# Altium PCB 20230727_DAFABT-验证-FPC-73颗灯板.PcbDoc (part 1 of 2)
Units mm, origin at the board's own origin, x right, y up, seen from the top; angles counter-clockwise.
Board outline 277.23 x 135.59 mm, 2 copper layers (Top Layer, Bottom Layer); 80 components, 3 nets, 172 pads, 0 vias.
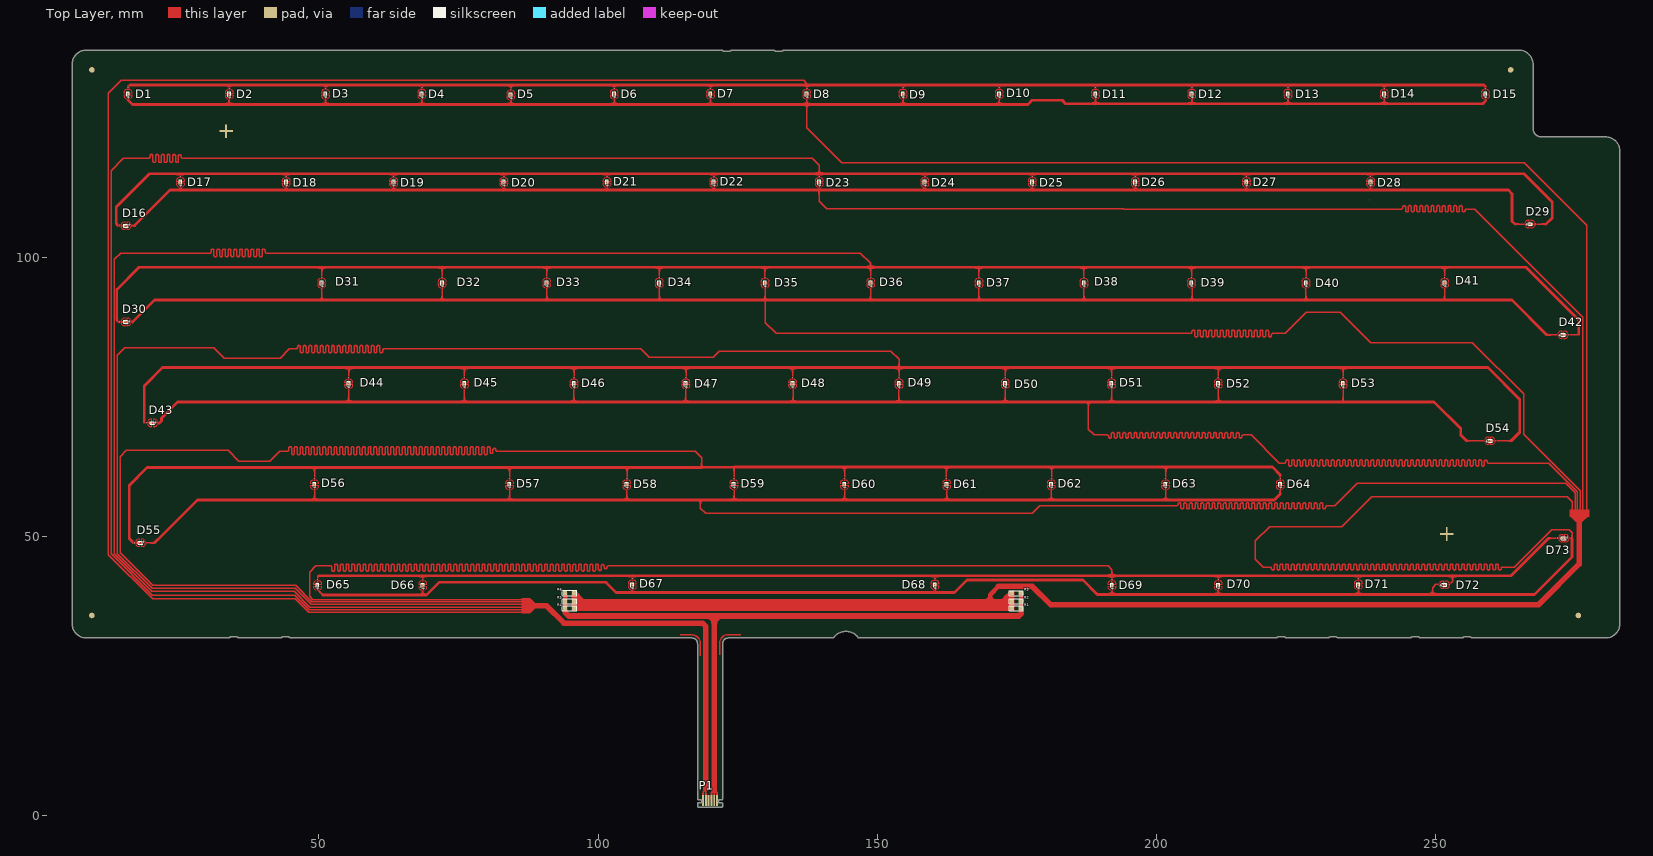
[diagram p0: Top Layer view]
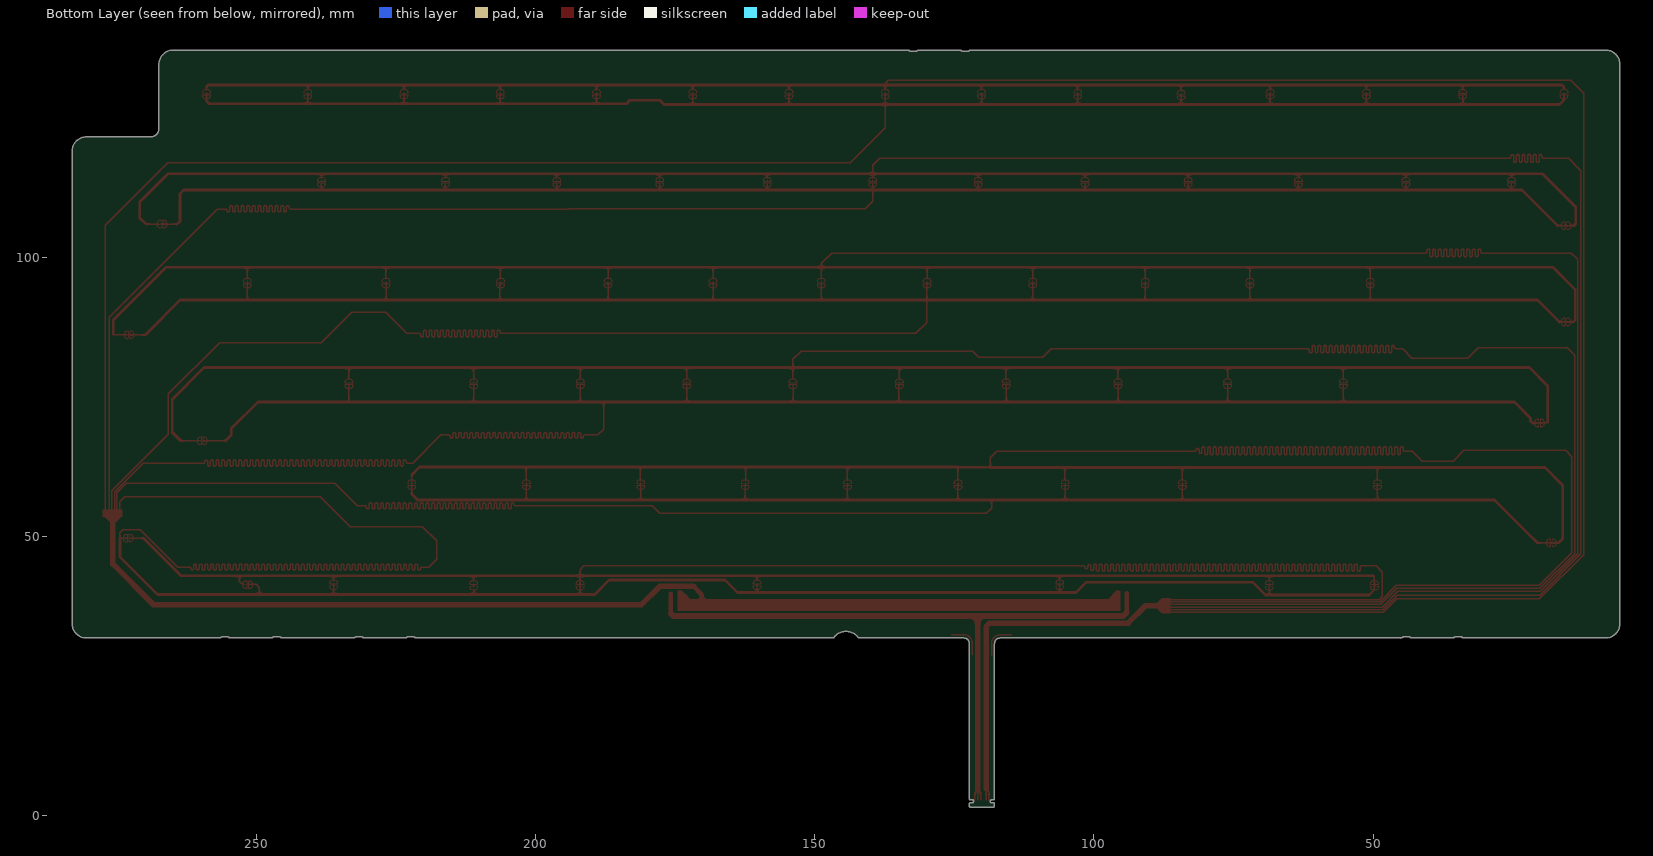
[diagram p1: Bottom Layer view, seen from below]

## Layer stack, top to bottom
Top Solder: solder mask 0.0102, Solder Resist, Dk 3.5
Top Layer: signal copper 0.0356
Dielectric 1: dielectric 0.32, FR-4, Dk 4.8
Bottom Layer: signal copper 0.0356
Bottom Solder: solder mask 0.0102, Solder Resist, Dk 3.5

## Board outline
8.399,31.791 33.785,31.791 ccw(c33.785,32.091) 33.983,31.865 cw(c34.314,31.491) 34.314,31.99 35.214,31.99 cw(c35.214,31.491) 35.545,31.865 ccw(c35.743,32.091) 35.743,31.791 43.085,31.791 ccw(c43.085,32.09) 43.283,31.865 cw(c43.614,31.49) 43.614,31.99 44.514,31.99 cw(c44.514,31.49) 44.845,31.865 44.845,31.866 ccw(c45.029,32.054) 45.043,31.791 116.816,31.791 cw(c116.816,30.79) 117.816,30.79 117.816,3 ccw(c118.016,3) 118.016,2.8 118.366,2.8 cw(c118.366,2.601) 118.566,2.601 118.566,2.5 cw(c118.366,2.5) 118.366,2.3 118.016,2.3 ccw(c118.016,2.1) 117.816,2.1 117.816,1.7 ccw(c118.016,1.7) 118.016,1.5 122.116,1.5 ccw(c122.116,1.7) 122.316,1.7 122.316,2.1 ccw(c122.116,2.1) 122.116,2.3 121.766,2.3 cw(c121.766,2.5) 121.566,2.5 121.566,2.601 cw(c121.766,2.601) 121.766,2.8 122.116,2.8 ccw(c122.116,3) 122.316,3 122.316,30.79 cw(c123.316,30.79) 123.316,31.791 142.006,31.791 ccw(c142.006,32.09) 142.246,31.911 cw(c144.406,30.29) 146.566,31.911 ccw(c146.806,32.09) 146.806,31.791 221.385,31.791 ccw(c221.385,32.091) 221.583,31.865 cw(c221.914,31.491) 221.914,31.99 222.814,31.99 cw(c222.814,31.49) 223.145,31.865 ccw(c223.343,32.091) 223.343,31.791 230.685,31.791 ccw(c230.685,32.091) 230.883,31.865 cw(c231.214,31.491) 231.214,31.99 232.114,31.99 cw(c232.114,31.491) 232.445,31.865 ccw(c232.643,32.091) 232.643,31.791 245.385,31.791 ccw(c245.385,32.091) 245.583,31.865 cw(c245.914,31.491) 245.914,31.99 246.814,31.99 cw(c246.814,31.491) 247.145,31.865 ccw(c247.347,32.102) 247.343,31.791 254.685,31.791 ccw(c254.685,32.091) 254.883,31.865 cw(c255.214,31.491) 255.214,31.99 256.114,31.99 cw(c256.114,31.491) 256.445,31.865 ccw(c256.643,32.091) 256.643,31.791 280.424,31.791 ccw(c280.424,34.391) 283.024,34.391 283.024,118.94 ccw(c280.424,118.94) 280.424,121.54 268.973,121.54 cw(c268.973,123.04) 267.473,123.04 267.473,134.49 ccw(c264.873,134.49) 264.873,137.09 133.323,137.09 ccw(c133.323,136.79) 133.125,137.015 cw(c132.794,137.39) 132.794,136.89 131.894,136.89 cw(c131.894,137.39) 131.563,137.015 ccw(c131.365,136.79) 131.365,137.09 124.023,137.09 ccw(c124.023,136.791) 123.825,137.015 cw(c123.494,137.391) 123.494,136.89 122.594,136.89 cw(c122.594,137.391) 122.263,137.015 ccw(c122.065,136.791) 122.065,137.09 8.399,137.09 ccw(c8.399,134.49) 5.799,134.49 5.799,34.391 ccw(c8.399,34.391)

## Design rules (kind name [scope] priority, off if disabled: settings)
Clearance [All] p1: gap=0.254 ignorepadtopadclearanceinfootprint=TRUE except(0: Arc-Hole Track-Hole SMDPad-Hole THPad-Hole Via-Hole Fill-Hole Poly-Hole Region-Hole Text-Hole)
ComponentClearance [All] p1 off: gap=0.254 collisioncheckmode=3 verticalgap=0.254 showdistances=FALSE
MinimumSolderMaskSliver [All] p1 off: minsoldermaskwidth=0.254
PlaneClearance [All] p1 off: clearance=0.508
PlaneConnect [All] p1: pad.planeconnectstyle=Relief pad.reliefexpansion=0.508 pad.reliefentries=4 pad.reliefconductorwidth=0.254 pad.reliefairgap=0.254 via.planeconnectstyle=Direct via.reliefexpansion=0.508 via.reliefentries=4 via.reliefconductorwidth=0.254 via.reliefairgap=0.254
PolygonConnect [All] p1: connectstyle=Relief reliefconductorwidth=0.254 reliefentries=4 polygonreliefangle="90 Angle" airgapwidth=0.254
RoutingVias [All] p1: holewidth=0.711 width=1.27 viastyle="Through Hole" minholewidth=0.711 minwidth=1.27 maxholewidth=0.711 maxwidth=1.27
SilkToSilkClearance [All] p1 off: silktosilkclearance=0.254
SilkToSolderMaskClearance [IsPad] p1 off: minsilkscreentomaskgap=0.254 clearancetoexposedcopper=TRUE
SolderMaskExpansion [All] p1: expansion=0.102 istentingtop=FALSE
Width [All] p1: maxlimit=0.254 minlimit=0.254 preferedwidth=0.254
24 further rules are at their usual default settings.

## Components (designator, comment, footprint, x,y, rotation, side; value= is the part's Value field where it differs from the comment)
D1 "W" 圆弧灯 15.824,129.215 r0 top
D2 "W" 圆弧灯 33.967,129.162 r0 top
D3 "W" 圆弧灯 51.204,129.206 r0 top
D4 "W" 圆弧灯 68.44,129.215 r0 top
D5 "W" 圆弧灯 84.39,129.029 r0 top
D6 "W" 圆弧灯 102.913,129.206 r0 top
D7 "W" 圆弧灯 120.15,129.206 r0 top
D8 "W" 圆弧灯 137.386,129.206 r0 top
D9 "W" 圆弧灯 154.623,129.215 r0 top
D10 "W" 圆弧灯 171.859,129.215 r0 top
D11 "W" 圆弧灯 189.096,129.215 r0 top
D12 "W" 圆弧灯 206.332,129.215 r0 top
D13 "W" 圆弧灯 223.569,129.215 r0 top
D14 "W" 圆弧灯 240.805,129.206 r0 top
D15 "W" 圆弧灯 258.948,129.198 r0 top
D16 "W" 圆弧灯 15.464,105.631 r90 top
D17 "W" 圆弧灯 25.219,113.412 r0 top
D18 "W" 圆弧灯 44.143,113.412 r0 top
D19 "W" 圆弧灯 63.389,113.412 r0 top
D20 "W" 圆弧灯 83.13,113.412 r0 top
D21 "W" 圆弧灯 101.606,113.412 r0 top
D22 "W" 圆弧灯 120.727,113.412 r0 top
D23 "W" 圆弧灯 139.628,113.412 r0 top
D24 "W" 圆弧灯 158.518,113.412 r0 top
D25 "W" 圆弧灯 177.778,113.412 r0 top
D26 "W" 圆弧灯 196.222,113.412 r0 top
D27 "W" 圆弧灯 216.134,113.412 r0 top
D28 "W" 圆弧灯 238.367,113.412 r0 top
D29 "W" 圆弧灯 266.91,105.92 r270 top
D30 "W" 圆弧灯 15.464,88.407 r90 top (schematic designator 30)
D31 "W" 圆弧灯 50.517,95.362 r0 top
D32 "W" 圆弧灯 72.085,95.362 r0 top
D33 "W" 圆弧灯 90.813,95.362 r0 top
D34 "W" 圆弧灯 110.971,95.362 r0 top
D35 "W" 圆弧灯 129.917,95.362 r0 top
D36 "W" 圆弧灯 148.843,95.362 r0 top
D37 "W" 圆弧灯 168.241,95.362 r0 top
D38 "W" 圆弧灯 187.033,95.362 r0 top
D39 "W" 圆弧灯 206.281,95.362 r0 top
D40 "W" 圆弧灯 226.797,95.362 r0 top
D41 "W" 圆弧灯 251.637,95.362 r0 top
D42 "W" 圆弧灯 272.797,86.09 r270 top
D43 "W" 圆弧灯 20.201,70.309 r90 top
D44 "W" 圆弧灯 55.332,77.312 r0 top
D45 "W" 圆弧灯 76.072,77.312 r0 top
D46 "W" 圆弧灯 95.689,77.312 r0 top
D47 "W" 圆弧灯 115.722,77.312 r0 top
D48 "W" 圆弧灯 134.853,77.312 r0 top
D49 "W" 圆弧灯 153.911,77.312 r0 top
D50 "W" 圆弧灯 172.935,77.312 r0 top
D51 "W" 圆弧灯 191.975,77.312 r0 top
D52 "W" 圆弧灯 211.072,77.312 r0 top
D53 "W" 圆弧灯 233.435,77.312 r0 top
D54 "W" 圆弧灯 259.71,67.111 r270 top
D55 "W" 圆弧灯 18.066,48.842 r90 top
D56 "W" 圆弧灯 49.216,59.262 r0 top
D57 "W" 圆弧灯 84.161,59.262 r0 top
D58 "W" 圆弧灯 105.143,59.262 r0 top
D59 "W" 圆弧灯 124.331,59.262 r0 top
D60 "W" 圆弧灯 144.131,59.262 r0 top
D61 "W" 圆弧灯 162.447,59.262 r0 top
D62 "W" 圆弧灯 181.178,59.262 r0 top
D63 "W" 圆弧灯 201.651,59.262 r0 top
D64 "W" 圆弧灯 222.18,59.262 r0 top
D65 "W" 圆弧灯 49.765,41.212 r0 top
D66 "W" 圆弧灯 68.603,41.212 r0 top
D67 "W" 圆弧灯 106.135,41.305 r0 top
D68 "W" 圆弧灯 160.336,41.305 r0 top
D69 "W" 圆弧灯 192.036,41.212 r0 top
D70 "W" 圆弧灯 211.086,41.212 r0 top
D71 "W" 圆弧灯 236.168,41.305 r0 top
D72 "W" 圆弧灯 251.568,41.327 r270 top
D73 "W" 圆弧灯 272.966,49.652 r90 top
P1 "FPC-6PIN" MINI-FPC-6P 118.816,2.7 r0 top
R1 "RJ" 改0603 174.922,37.11 r180 top
R2 "RJ" 改0603 174.922,38.37 r180 top
R3 "RJ" 改0603 174.922,39.823 r180 top
R4 "RJ" 改0603 94.899,37.11 r0 top
R5 "RJ" 改0603 94.899,38.37 r0 top
R6 "RJ" 改0603 94.899,39.823 r0 top

## Footprints (in the part's own frame and the unit in brackets; to place one, negate y for a bottom-side part, rotate by r counter-clockwise, add the part's x,y. Pads: shape width x height; smd on the part's side, far side on the other; paste and mask are expansions set on the pad)
MINI-FPC-6P [mm]
  rect 0.35x2 smd: 1(0,0) 2(0.5,0) 3(1,0) 4(1.5,0) 5(2,0) 6(2.5,0)
圆弧灯 [mm]
  rect 0.3x0.26 smd: 1(0,-0.19) 2(0,0.19)
  Top Layer region: 0.251,0.9 0.317,0.885 0.419,0.845 0.513,0.787 0.595,0.712 0.661,0.624 0.709,0.527 0.74,0.421 0.75,0.31 0.75,0.159 0.739,0.133 0.716,0.119 0.131,0.116 0.131,0.116 0.131,0.115 0.131,0.115 0.131,0.115 0.13,0.115 0.13,0.115 0.13,0.061 -0.127,0.061 -0.127,0.115 -0.128,0.115 -0.128,0.115 -0.128,0.115 -0.128,0.115 -0.129,0.116 -0.713,0.119 -0.737,0.133 -0.747,0.159 -0.745,0.371 -0.724,0.48 -0.687,0.574 -0.626,0.675 -0.551,0.757 -0.463,0.823 -0.364,0.872 -0.264,0.9 -0.171,0.91 0.103,0.91 hole: -0.128,0.715 -0.128,0.714 -0.128,0.715 -0.226,0.704 -0.226,0.704 -0.226,0.704 -0.303,0.681 -0.303,0.681 -0.303,0.681 -0.381,0.637 -0.381,0.637 -0.381,0.637 -0.447,0.576 -0.447,0.575 -0.448,0.575 -0.498,0.501 -0.498,0.501 -0.499,0.501 -0.531,0.417 -0.531,0.417 -0.532,0.417 -0.537,0.378 -0.537,0.378 -0.545,0.328 -0.545,0.328 -0.545,0.328 -0.545,0.313 -0.545,0.313 -0.545,0.313 -0.544,0.289 -0.544,0.288 -0.544,0.288 -0.544,0.287 -0.529,0.272 -0.529,0.272 -0.528,0.271 -0.511,0.265 -0.511,0.265 -0.511,0.265 -0.129,0.265 -0.128,0.265 -0.127,0.266 -0.127,0.318 -0.074,0.318 -0.073,0.319 -0.072,0.319 -0.072,0.71 -0.073,0.71 -0.073,0.711 -0.073,0.711 -0.073,0.711 -0.073,0.711 -0.073,0.711 -0.1,0.714 -0.101,0.714 -0.101,0.714 hole: 0.076,0.71 0.076,0.71 0.076,0.71 0.076,0.71 0.075,0.709 0.075,0.709 0.075,0.709 0.075,0.319 0.076,0.319 0.076,0.318 0.13,0.318 0.13,0.266 0.131,0.265 0.131,0.265 0.511,0.265 0.511,0.265 0.512,0.265 0.523,0.268 0.523,0.268 0.523,0.268 0.541,0.283 0.541,0.283 0.541,0.283 0.549,0.302 0.549,0.302 0.55,0.303 0.55,0.312 0.55,0.312 0.55,0.312 0.54,0.401 0.539,0.401 0.539,0.401 0.51,0.486 0.509,0.486 0.509,0.486 0.461,0.562 0.461,0.562 0.461,0.562 0.397,0.626 0.397,0.626 0.397,0.626 0.321,0.673 0.321,0.673 0.32,0.673 0.235,0.702 0.235,0.702 0.235,0.702 0.22,0.705 0.22,0.705 0.22,0.705 0.076,0.71 0.076,0.71 0.076,0.71
  Top Layer region: 0.129,-0.115 0.129,-0.116 0.129,-0.116 0.129,-0.116 0.129,-0.116 0.13,-0.116 0.13,-0.117 0.716,-0.12 0.741,-0.135 0.75,-0.163 0.74,-0.415 0.722,-0.486 0.684,-0.583 0.626,-0.676 0.551,-0.757 0.463,-0.823 0.365,-0.872 0.259,-0.902 0.149,-0.912 -0.198,-0.909 -0.306,-0.89 -0.41,-0.852 -0.504,-0.795 -0.586,-0.722 -0.654,-0.635 -0.705,-0.537 -0.736,-0.432 -0.749,-0.322 -0.748,-0.163 -0.739,-0.135 -0.714,-0.12 -0.13,-0.12 -0.129,-0.119 -0.129,-0.119 -0.129,-0.062 0.129,-0.062 hole: -0.13,-0.266 -0.511,-0.266 -0.511,-0.266 -0.511,-0.266 -0.523,-0.269 -0.523,-0.269 -0.523,-0.269 -0.533,-0.275 -0.533,-0.276 -0.534,-0.276 -0.546,-0.292 -0.546,-0.292 -0.546,-0.292 -0.546,-0.304 -0.547,-0.316 -0.547,-0.316 -0.547,-0.317 -0.537,-0.405 -0.537,-0.406 -0.537,-0.406 -0.507,-0.49 -0.507,-0.49 -0.507,-0.49 -0.459,-0.566 -0.458,-0.566 -0.458,-0.566 -0.395,-0.628 -0.394,-0.628 -0.394,-0.629 -0.318,-0.675 -0.318,-0.675 -0.318,-0.675 -0.233,-0.704 -0.233,-0.704 -0.233,-0.704 -0.221,-0.706 -0.221,-0.706 -0.221,-0.706 -0.075,-0.711 -0.075,-0.711 -0.075,-0.711 -0.075,-0.711 -0.074,-0.711 -0.074,-0.711 -0.074,-0.711 -0.074,-0.71 -0.074,-0.71 -0.074,-0.71 -0.074,-0.32 -0.074,-0.32 -0.075,-0.319 -0.129,-0.319 -0.129,-0.267 -0.129,-0.266 hole: 0.13,-0.266 0.129,-0.266 0.129,-0.267 0.129,-0.319 0.075,-0.319 0.074,-0.32 0.074,-0.32 0.074,-0.709 0.074,-0.71 0.074,-0.71 0.074,-0.71 0.074,-0.71 0.075,-0.71 0.075,-0.711 0.098,-0.713 0.098,-0.713 0.098,-0.713 0.121,-0.714 0.121,-0.714 0.121,-0.714 0.179,-0.711 0.179,-0.711 0.179,-0.711 0.237,-0.704 0.237,-0.704 0.237,-0.704 0.322,-0.675 0.322,-0.675 0.322,-0.675 0.399,-0.627 0.399,-0.627 0.399,-0.627 0.463,-0.564 0.463,-0.563 0.463,-0.563 0.511,-0.487 0.511,-0.487 0.511,-0.487 0.541,-0.402 0.541,-0.402 0.541,-0.402 0.551,-0.313 0.551,-0.313 0.551,-0.313 0.551,-0.313 0.551,-0.313 0.551,-0.313 0.55,-0.295 0.55,-0.295 0.55,-0.295 0.538,-0.277 0.538,-0.277 0.538,-0.277 0.521,-0.268 0.521,-0.268 0.521,-0.267 0.513,-0.266 0.513,-0.266 0.513,-0.266
  silkscreen extent -0.25,-0.42 0.25,0.42
改0603 [mm]
  rect 0.75x0.75 smd: 1(-0.8,0) 2(0.8,0)
  silkscreen extent -1.27,-0.47 1.27,0.48

## Part data
D1 D2 D3 D4 D5 D6 D7 D8 D9 D10 D11 D12 D13 D14 D15 D16 D17 D18 D19 D20 D21 D22 D23 D24 D25 D26 D27 D28 D29 D30 D31 D32 D33 D34 D35 D36 D37 D38 D39 D40 D41 D42 D43 D44 D45 D46 D47 D48 D49 D50 D51 D52 D53 D54 D55 D56 D57 D58 D59 D60 D61 D62 D63 D64 D65 D66 D67 D68 D69 D70 D71 D72 D73: library part LED
R1 R2 R3 R4 R5 R6: library part RJ0603

## Free pads (board coordinates)
  round 1 smd: 5(9.348,133.534) 6(9.348,35.825) 7(263.453,133.534) 8(275.585,35.825)
  rect 0.3x2.428 smd: 9(33.385,122.582) 11(252.008,50.415)
  rect 2.428x0.3 smd: 10(33.385,122.582) 12(252.008,50.415)

## Nets (pads, with @x,y where several pads share a name; then routed paths per layer and width w, separated by ;. In a path a pad name is that pad's centre, name@x,y a point inside that pad or via, vN(x,y) a via of type N, cw(c..) or ccw(c..) an arc to the next point about the centre after c; other vN are vias at no path point)
GND: D1.2 D2.2 D3.2 D4.2 D5.2 D6.2 D7.2 D8.2 D9.2 D10.2 D11.2 D12.2 D13.2 D14.2 D15.2 D16.2 D17.2 D18.2 D19.2 D20.2 D21.2 D22.2 D23.2 D24.2 D25.2 D26.2 D27.2 D28.2 D29.2 D30.2 D31.2 D32.2 D33.2 D34.2 D35.2 D36.2 D37.2 D38.2 D39.2 D40.2 D41.2 D42.2 D43.2 D44.2 D45.2 D46.2 D47.2 D48.2 D49.2 D50.2 D51.2 D52.2 D53.2 D54.2 D55.2 D56.2 D57.2 D58.2 D59.2 D60.2 D61.2 D62.2 D63.2 D64.2 D65.2 D66.2 D67.2 D68.2 D69.2 D70.2 D71.2 D72.2 D73.2 P1.1 P1.2 | length 3414.2
  Top Layer w0.254: 14.08,105.631 D16.2@15.274,105.631 ; 14.133,88.407 D30.2@15.274,88.407 ; 15.821,130.006 15.863,130.048 15.863,130.543 ; 16.817,48.842 D55.2@17.876,48.842 ; 18.72,70.458 18.869,70.309 D43.2@20.011,70.309 ; 25.197,114.935 25.197,114.274 25.214,114.256 ; 33.96,130.836 33.96,129.953 33.971,129.942 ; 44.135,114.206 44.145,114.216 44.145,114.935 ; 49.207,60.024 49.225,60.042 49.225,62.332 ; D65.2@49.765,41.402 49.765,42.729 49.987,42.951 ; 50.512,96.147 50.546,96.181 50.546,98.196 ; 51.207,130 51.232,130.025 51.232,130.836 ; 55.33,78.103 55.372,78.146 55.372,80.213 ; 63.385,114.202 63.398,114.215 63.398,114.935 ; 68.428,130.836 68.428,129.993 68.429,129.992 ; 68.594,41.989 68.605,42.001 68.605,42.951 ; D66.2@68.603,41.402 D66.2@68.653,41.452 ; 72.085,98.196 72.085,96.17 72.091,96.164 ; 76.073,78.115 76.073,80.213 ; 83.096,114.322 83.109,114.334 83.109,114.935 ; 84.167,60.045 84.176,60.054 84.176,62.332 ; 84.393,129.825 84.404,129.836 84.404,130.836 ; 86.879,37.795 48.666,37.795 45.796,40.665 20.142,40.665 13.915,46.892 13.915,82.448 15.211,83.744 31.213,83.744 33.042,81.915 43.075,81.915 44.726,83.566 45.796,83.566 45.923,83.566 ccw(c45.923,83.82) 46.177,83.82 46.177,83.933 cw(c46.431,83.933) 46.685,83.933 46.685,83.122 ccw(c46.939,83.122) 47.193,83.122 47.193,83.933 cw(c47.447,83.933) 47.701,83.933 47.701,83.122 ccw(c47.955,83.122) 48.209,83.122 48.209,83.933 cw(c48.463,83.933) 48.717,83.933 48.717,83.122 ccw(c48.971,83.122) 49.225,83.122 49.225,83.933 cw(c49.479,83.933) 49.733,83.933 49.733,83.122 ccw(c49.987,83.122) 50.241,83.122 50.241,83.933 cw(c50.495,83.933) 50.749,83.933 50.749,83.122 ccw(c51.003,83.122) 51.257,83.122 51.257,83.933 cw(c51.511,83.933) 51.765,83.933 51.765,83.122 ccw(c52.019,83.122) 52.273,83.122 52.273,83.933 cw(c52.527,83.933) 52.781,83.933 52.781,83.122 ccw(c53.035,83.122) 53.289,83.122 53.289,83.933 cw(c53.543,83.933) 53.797,83.933 53.797,83.122 ccw(c54.051,83.122) 54.305,83.122 54.305,83.933 cw(c54.559,83.933) 54.813,83.933 54.813,83.122 ccw(c55.067,83.122) 55.321,83.122 55.321,83.933 cw(c55.575,83.933) 55.829,83.933 55.829,83.122 ccw(c56.083,83.122) 56.337,83.122 56.337,83.933 cw(c56.591,83.933) 56.845,83.933 56.845,83.122 ccw(c57.099,83.122) 57.353,83.122 57.353,83.933 cw(c57.607,83.933) 57.861,83.933 57.861,83.122 ccw(c58.115,83.122) 58.369,83.122 58.369,83.933 cw(c58.623,83.933) 58.877,83.933 58.877,83.122 ccw(c59.131,83.122) 59.385,83.122 59.385,83.933 cw(c59.639,83.933) 59.893,83.933 59.893,83.122 ccw(c60.147,83.122) 60.401,83.122 60.401,83.933 cw(c60.655,83.933) 60.909,83.933 60.909,83.122 ccw(c61.163,83.122) 61.417,83.122 61.417,83.312 cw(c61.671,83.312) 61.671,83.566 104.621,83.566 107.667,83.566 109.14,82.093 120.599,82.093 121.666,83.16 152.425,83.16 153.911,81.674 153.911,80.213 153.911,78.111 ; 86.891,37.338 48.412,37.338 45.618,40.132 20.091,40.132 13.36,46.863 13.36,99.593 14.478,100.711 30.328,100.711 30.455,100.711 ccw(c30.455,100.965) 30.709,100.965 30.709,101.194 cw(c30.963,101.194) 31.217,101.194 31.217,100.303 ccw(c31.471,100.303) 31.725,100.303 31.725,101.194 cw(c31.979,101.194) 32.233,101.194 32.233,100.303 ccw(c32.487,100.303) 32.741,100.303 32.741,101.194 cw(c32.995,101.194) 33.249,101.194 33.249,100.303 ccw(c33.503,100.303) 33.757,100.303 33.757,101.194 cw(c34.011,101.194) 34.265,101.194 34.265,100.303 ccw(c34.519,100.303) 34.773,100.303 34.773,101.194 cw(c35.027,101.194) 35.281,101.194 35.281,100.303 ccw(c35.535,100.303) 35.789,100.303 35.789,101.194 cw(c36.043,101.194) 36.297,101.194 36.297,100.303 ccw(c36.551,100.303) 36.805,100.303 36.805,101.194 cw(c37.059,101.194) 37.313,101.194 37.313,100.303 ccw(c37.567,100.303) 37.821,100.303 37.821,101.194 cw(c38.075,101.194) 38.329,101.194 38.329,100.303 ccw(c38.583,100.303) 38.837,100.303 38.837,101.194 cw(c39.091,101.194) 39.345,101.194 39.345,100.303 ccw(c39.599,100.303) 39.853,100.303 39.853,101.194 cw(c40.107,101.194) 40.361,101.194 40.361,100.965 ccw(c40.615,100.965) 40.615,100.711 63.602,100.711 146.99,100.711 148.819,98.882 148.819,98.196 148.819,96.18 148.843,96.155 ; 86.897,36.855 48.26,36.855 45.644,39.472 20.168,39.472 12.802,46.838 12.802,115.494 15.011,117.704 19.38,117.704 19.507,117.704 ccw(c19.507,117.958) 19.761,117.958 19.761,118.152 cw(c20.015,118.152) 20.269,118.152 20.269,117.211 ccw(c20.523,117.211) 20.777,117.211 20.777,118.152 cw(c21.031,118.152) 21.285,118.152 21.285,117.211 ccw(c21.539,117.211) 21.793,117.211 21.793,118.152 cw(c22.047,118.152) 22.301,118.152 22.301,117.211 ccw(c22.555,117.211) 22.809,117.211 22.809,118.152 cw(c23.063,118.152) 23.317,118.152 23.317,117.211 ccw(c23.571,117.211) 23.825,117.211 23.825,118.152 cw(c24.079,118.152) 24.333,118.152 24.333,117.211 ccw(c24.587,117.211) 24.841,117.211 24.841,118.093 cw(c25.095,118.093) 25.349,118.093 25.349,117.958 ccw(c25.603,117.958) 25.603,117.704 45.288,117.704 138.405,117.704 139.624,116.484 139.624,114.935 139.624,114.218 139.631,114.212 ; 86.924,36.374 48.182,36.374 48.108,36.449 45.771,38.786 20.218,38.786 12.294,46.711 12.294,129.362 14.63,131.699 136.804,131.699 137.414,131.089 137.414,130.836 137.414,130.029 137.387,130.002 ; 86.949,38.252 48.768,38.252 45.822,41.199 20.244,41.199 14.681,46.761 14.402,47.041 14.402,64.287 15.494,65.38 33.757,65.38 35.662,63.475 41.228,63.475 41.377,63.623 41.377,63.627 43.002,65.253 44.221,65.253 44.348,65.253 ccw(c44.348,65.507) 44.602,65.507 44.602,65.787 cw(c44.856,65.787) 45.11,65.787 45.11,64.845 ccw(c45.364,64.845) 45.618,64.845 45.618,65.787 cw(c45.872,65.787) 46.126,65.787 46.126,64.845 ccw(c46.38,64.845) 46.634,64.845 46.634,65.787 cw(c46.888,65.787) 47.142,65.787 47.142,64.845 ccw(c47.396,64.845) 47.65,64.845 47.65,65.787 cw(c47.904,65.787) 48.158,65.787 48.158,64.845 ccw(c48.412,64.845) 48.666,64.845 48.666,65.787 cw(c48.92,65.787) 49.174,65.787 49.174,64.845 ccw(c49.428,64.845) 49.682,64.845 49.682,65.787 cw(c49.936,65.787) 50.19,65.787 50.19,64.845 ccw(c50.444,64.845) 50.698,64.845 50.698,65.787 cw(c50.952,65.787) 51.206,65.787 51.206,64.845 ccw(c51.46,64.845) 51.714,64.845 51.714,65.787 cw(c51.968,65.787) 52.222,65.787 52.222,64.845 ccw(c52.476,64.845) 52.73,64.845 52.73,65.787 cw(c52.984,65.787) 53.238,65.787 53.238,64.845 ccw(c53.492,64.845) 53.746,64.845 53.746,65.787 cw(c54,65.787) 54.254,65.787 54.254,64.845 ccw(c54.508,64.845) 54.762,64.845 54.762,65.787 cw(c55.016,65.787) 55.27,65.787 55.27,64.845 ccw(c55.524,64.845) 55.778,64.845 55.778,65.787 cw(c56.032,65.787) 56.286,65.787 56.286,64.845 ccw(c56.54,64.845) 56.794,64.845 56.794,65.787 cw(c57.048,65.787) 57.302,65.787 57.302,64.845 ccw(c57.556,64.845) 57.81,64.845 57.81,65.787 cw(c58.064,65.787) 58.318,65.787 58.318,64.845 ccw(c58.572,64.845) 58.826,64.845 58.826,65.787 cw(c59.08,65.787) 59.334,65.787 59.334,64.845 ccw(c59.588,64.845) 59.842,64.845 59.842,65.787 cw(c60.096,65.787) 60.35,65.787 60.35,64.845 ccw(c60.604,64.845) 60.858,64.845 60.858,65.787 cw(c61.112,65.787) 61.366,65.787 61.366,64.845 ccw(c61.62,64.845) 61.874,64.845 61.874,65.787 cw(c62.128,65.787) 62.382,65.787 62.382,64.845 ccw(c62.636,64.845) 62.89,64.845 62.89,65.787 cw(c63.144,65.787) 63.398,65.787 63.398,64.845 ccw(c63.652,64.845) 63.906,64.845 63.906,65.787 cw(c64.16,65.787) 64.414,65.787 64.414,64.845 ccw(c64.668,64.845) 64.922,64.845 64.922,65.787 cw(c65.176,65.787) 65.43,65.787 65.43,64.845 ccw(c65.684,64.845) 65.938,64.845 65.938,65.787 cw(c66.192,65.787) 66.446,65.787 66.446,64.845 ccw(c66.7,64.845) 66.954,64.845 66.954,65.787 cw(c67.208,65.787) 67.462,65.787 67.462,64.845 ccw(c67.716,64.845) 67.97,64.845 67.97,65.787 cw(c68.224,65.787) 68.478,65.787 68.478,64.845 ccw(c68.732,64.845) 68.986,64.845 68.986,65.787 cw(c69.24,65.787) 69.494,65.787 69.494,64.845 ccw(c69.748,64.845) 70.002,64.845 70.002,65.787 cw(c70.256,65.787) 70.51,65.787 70.51,64.845 ccw(c70.764,64.845) 71.018,64.845 71.018,65.787 cw(c71.272,65.787) 71.526,65.787 71.526,64.845 ccw(c71.78,64.845) 72.034,64.845 72.034,65.787 cw(c72.288,65.787) 72.542,65.787 72.542,64.845 ccw(c72.796,64.845) 73.05,64.845 73.05,65.787 cw(c73.304,65.787) 73.558,65.787 73.558,64.845 ccw(c73.812,64.845) 74.066,64.845 74.066,65.787 cw(c74.32,65.787) 74.574,65.787 74.574,64.845 ccw(c74.828,64.845) 75.082,64.845 75.082,65.787 cw(c75.336,65.787) 75.59,65.787 75.59,64.845 ccw(c75.844,64.845) 76.098,64.845 76.098,65.787 cw(c76.352,65.787) 76.606,65.787 76.606,64.845 ccw(c76.86,64.845) 77.114,64.845 77.114,65.787 cw(c77.368,65.787) 77.622,65.787 77.622,64.845 ccw(c77.876,64.845) 78.13,64.845 78.13,65.787 cw(c78.384,65.787) 78.638,65.787 78.638,64.845 ccw(c78.892,64.845) 79.146,64.845 79.146,65.787 cw(c79.4,65.787) 79.654,65.787 79.654,64.845 ccw(c79.908,64.845) 80.162,64.845 80.162,65.787 cw(c80.416,65.787) 80.67,65.787 80.67,65.098 ccw(c80.924,65.098) 81.178,65.098 81.178,65.507 cw(c81.432,65.507) 81.686,65.507 ccw(c81.94,65.507) 81.94,65.253 102.921,65.253 117.424,65.253 118.567,64.11 118.567,62.382 ; 87.114,38.684 48.917,38.684 48.336,39.265 48.336,43.586 49.454,44.704 51.435,44.704 52.07,44.704 cw(c52.07,44.45) 52.324,44.45 52.324,44.011 ccw(c52.578,44.011) 52.832,44.011 52.832,44.769 cw(c53.086,44.769) 53.34,44.769 53.34,44.011 ccw(c53.594,44.011) 53.848,44.011 53.848,44.769 cw(c54.102,44.769) 54.356,44.769 54.356,44.011 ccw(c54.61,44.011) 54.864,44.011 54.864,44.769 cw(c55.118,44.769) 55.372,44.769 55.372,44.011 ccw(c55.626,44.011) 55.88,44.011 55.88,44.769 cw(c56.134,44.769) 56.388,44.769 56.388,44.011 ccw(c56.642,44.011) 56.896,44.011 56.896,44.769 cw(c57.15,44.769) 57.404,44.769 57.404,44.011 ccw(c57.658,44.011) 57.912,44.011 57.912,44.769 cw(c58.166,44.769) 58.42,44.769 58.42,44.011 ccw(c58.674,44.011) 58.928,44.011 58.928,44.769 cw(c59.182,44.769) 59.436,44.769 59.436,44.011 ccw(c59.69,44.011) 59.944,44.011 59.944,44.769 cw(c60.198,44.769) 60.452,44.769 60.452,44.011 ccw(c60.706,44.011) 60.96,44.011 60.96,44.769 cw(c61.214,44.769) 61.468,44.769 61.468,44.011 ccw(c61.722,44.011) 61.976,44.011 61.976,44.769 cw(c62.23,44.769) 62.484,44.769 62.484,44.011 ccw(c62.738,44.011) 62.992,44.011 62.992,44.769 cw(c63.246,44.769) 63.5,44.769 63.5,44.011 ccw(c63.754,44.011) 64.008,44.011 64.008,44.769 cw(c64.262,44.769) 64.516,44.769 64.516,44.011 ccw(c64.77,44.011) 65.024,44.011 65.024,44.769 cw(c65.278,44.769) 65.532,44.769 65.532,44.011 ccw(c65.786,44.011) 66.04,44.011 66.04,44.769 cw(c66.294,44.769) 66.548,44.769 66.548,44.011 ccw(c66.802,44.011) 67.056,44.011 67.056,44.769 cw(c67.31,44.769) 67.564,44.769 67.564,44.011 ccw(c67.818,44.011) 68.072,44.011 68.072,44.769 cw(c68.326,44.769) 68.58,44.769 68.58,44.011 ccw(c68.834,44.011) 69.088,44.011 69.088,44.769 cw(c69.342,44.769) 69.596,44.769 69.596,44.011 ccw(c69.85,44.011) 70.104,44.011 70.104,44.769 cw(c70.358,44.769) 70.612,44.769 70.612,44.011 ccw(c70.866,44.011) 71.12,44.011 71.12,44.769 cw(c71.374,44.769) 71.628,44.769 71.628,44.011 ccw(c71.882,44.011) 72.136,44.011 72.136,44.769 cw(c72.39,44.769) 72.644,44.769 72.644,44.011 ccw(c72.898,44.011) 73.152,44.011 73.152,44.769 cw(c73.406,44.769) 73.66,44.769 73.66,44.011 ccw(c73.914,44.011) 74.168,44.011 74.168,44.769 cw(c74.422,44.769) 74.676,44.769 74.676,44.011 ccw(c74.93,44.011) 75.184,44.011 75.184,44.769 cw(c75.438,44.769) 75.692,44.769 75.692,44.011 ccw(c75.946,44.011) 76.2,44.011 76.2,44.769 cw(c76.454,44.769) 76.708,44.769 76.708,44.011 ccw(c76.962,44.011) 77.216,44.011 77.216,44.769 cw(c77.47,44.769) 77.724,44.769 77.724,44.011 ccw(c77.978,44.011) 78.232,44.011 78.232,44.769 cw(c78.486,44.769) 78.74,44.769 78.74,44.011 ccw(c78.994,44.011) 79.248,44.011 79.248,44.769 cw(c79.502,44.769) 79.756,44.769 79.756,44.011 ccw(c80.01,44.011) 80.264,44.011 80.264,44.769 cw(c80.518,44.769) 80.772,44.769 80.772,44.011 ccw(c81.026,44.011) 81.28,44.011 81.28,44.769 cw(c81.534,44.769) 81.788,44.769 81.788,44.011 ccw(c82.042,44.011) 82.296,44.011 82.296,44.769 cw(c82.55,44.769) 82.804,44.769 82.804,44.011 ccw(c83.058,44.011) 83.312,44.011 83.312,44.769 cw(c83.566,44.769) 83.82,44.769 83.82,44.011 ccw(c84.074,44.011) 84.328,44.011 84.328,44.769 cw(c84.582,44.769) 84.836,44.769 84.836,44.011 ccw(c85.09,44.011) 85.344,44.011 85.344,44.769 cw(c85.598,44.769) 85.852,44.769 85.852,44.011 ccw(c86.106,44.011) 86.36,44.011 86.36,44.769 cw(c86.614,44.769) 86.868,44.769 86.868,44.011 ccw(c87.122,44.011) 87.376,44.011 87.376,44.769 cw(c87.63,44.769) 87.884,44.769 87.884,44.011 ccw(c88.138,44.011) 88.392,44.011 88.392,44.769 cw(c88.646,44.769) 88.9,44.769 88.9,44.011 ccw(c89.154,44.011) 89.408,44.011 89.408,44.769 cw(c89.662,44.769) 89.916,44.769 89.916,44.011 ccw(c90.17,44.011) 90.424,44.011 90.424,44.769 cw(c90.678,44.769) 90.932,44.769 90.932,44.011 ccw(c91.186,44.011) 91.44,44.011 91.44,44.769 cw(c91.694,44.769) 91.948,44.769 91.948,44.011 ccw(c92.202,44.011) 92.456,44.011 92.456,44.769 cw(c92.71,44.769) 92.964,44.769 92.964,44.011 ccw(c93.218,44.011) 93.472,44.011 93.472,44.769 cw(c93.726,44.769) 93.98,44.769 93.98,44.011 ccw(c94.234,44.011) 94.488,44.011 94.488,44.769 cw(c94.742,44.769) 94.996,44.769 94.996,44.011 ccw(c95.25,44.011) 95.504,44.011 95.504,44.769 cw(c95.758,44.769) 96.012,44.769 96.012,44.011 ccw(c96.266,44.011) 96.52,44.011 96.52,44.769 cw(c96.774,44.769) 97.028,44.769 97.028,44.011 ccw(c97.282,44.011) 97.536,44.011 97.536,44.769 cw(c97.79,44.769) 98.044,44.769 98.044,44.011 ccw(c98.298,44.011) 98.552,44.011 98.552,44.769 cw(c98.806,44.769) 99.06,44.769 99.06,44.011 ccw(c99.314,44.011) 99.568,44.011 99.568,44.769 cw(c99.822,44.769) 100.076,44.769 100.076,44.12 ccw(c100.33,44.12) 100.584,44.12 100.584,44.704 cw(c100.838,44.704) 101.092,44.704 101.092,44.45 ccw(c101.346,44.45) 101.6,44.45 cw(c101.854,44.45) 101.854,44.704 113.211,44.704 191.364,44.704 192.036,44.031 192.036,42.951 D69.2@192.036,41.402 ; 88.392,37.567 88.392,37.821 ; 90.815,96.152 90.83,96.167 90.83,98.196 ; 95.689,78.102 95.707,78.12 95.707,80.213 ; 101.6,114.935 101.6,114.318 101.61,114.309 ; 102.921,130.836 102.921,129.99 102.922,129.989 ; 105.136,60.054 105.207,60.125 105.207,62.332 ; 106.148,42.09 106.172,42.114 106.172,42.951 ; 110.971,96.124 110.973,96.125 110.973,98.196 ; 115.725,78.103 115.773,78.152 115.773,80.213 ; P1.1@118.816,2.7 118.816,4.262 119.316,4.762 ; P1.2@119.316,2.7 119.316,4.762 ; 119.329,4.775 119.316,4.762 ; 120.158,129.996 120.167,130.006 120.167,130.836 ; 120.726,114.935 120.726,114.228 120.73,114.224 ; 124.321,60.059 124.358,60.096 124.358,62.382 ; 129.896,98.196 129.896,96.181 129.917,96.159 ; 134.842,80.213 134.842,78.114 134.854,78.102 ; 144.124,60.042 144.145,60.062 144.145,62.408 ; 154.631,129.976 154.635,129.98 154.635,130.836 ; 158.515,114.205 158.547,114.236 158.547,114.935 ; 160.337,42.088 160.35,42.1 160.35,42.951 ; 162.408,62.408 162.408,60.102 162.448,60.062 ; 168.224,98.196 168.224,96.185 168.244,96.166 ; 171.868,130 171.882,130.014 171.882,130.836 ; 172.936,78.096 172.974,78.134 172.974,80.213 ; 177.775,114.202 177.8,114.227 177.8,114.935 ; 181.179,60.06 181.254,60.135 181.254,62.408 ; 186.995,98.196 186.995,96.204 187.037,96.162 ; 189.093,130.014 189.103,130.024 189.103,130.836 ; 191.973,80.213 191.973,78.126 191.98,78.119 ; 196.224,114.206 196.24,114.222 196.24,114.935 ; 201.648,60.065 201.701,60.119 201.701,62.408 ; 206.287,96.151 206.299,96.163 206.299,98.196 ; 206.326,129.978 206.35,130.002 206.35,130.836 ; 211.068,78.112 211.099,78.143 211.099,80.213 ; 211.098,42.007 211.099,42.009 211.099,42.951 ; 216.137,114.209 216.154,114.226 216.154,114.935 ; 222.18,59.583 222.18,61.002 ; 223.571,130.836 223.571,130.002 223.576,129.997 ; 226.809,96.139 226.822,96.151 226.822,98.196 ; 233.436,78.094 233.451,78.109 233.451,80.213 ; 236.161,42.099 236.169,42.107 236.169,42.951 ; 238.354,114.238 238.354,114.935 ; 240.805,130.836 240.805,130.005 240.824,129.985 ; 251.638,98.196 251.638,96.17 251.645,96.162 ; 252.373,41.316 253.035,41.978 253.035,42.951 ; 258.923,130.568 258.923,130.015 258.952,129.986 ; 260.031,67.111 263.555,67.111 ; 267.231,105.92 269.775,105.92 ; 270.256,49.657 272.641,49.657 272.645,49.652 ; 273.118,86.09 273.134,86.106 275.492,86.106 275.641,86.255
  Top Layer w0.5: 14.08,105.631 13.716,105.994 13.716,108.966 19.685,114.935 25.197,114.935 44.145,114.935 63.398,114.935 83.109,114.935 101.6,114.935 120.726,114.935 139.624,114.935 158.547,114.935 177.8,114.935 196.24,114.935 216.154,114.935 238.354,114.935 265.811,114.935 270.891,109.855 270.891,107.036 269.775,105.92 ; 14.133,88.407 13.818,88.722 13.818,94.211 17.803,98.196 50.546,98.196 72.085,98.196 90.83,98.196 110.973,98.196 129.896,98.196 148.819,98.196 168.224,98.196 186.995,98.196 206.299,98.196 226.822,98.196 251.638,98.196 266.217,98.196 275.641,88.773 275.641,86.255 ; 15.863,130.543 16.156,130.836 33.96,130.836 51.232,130.836 68.428,130.836 84.404,130.836 102.921,130.836 120.167,130.836 137.414,130.836 154.635,130.836 171.882,130.836 189.103,130.836 206.35,130.836 223.571,130.836 240.805,130.836 258.655,130.836 258.923,130.568 ; 16.817,48.842 16.053,49.606 16.053,59.131 19.253,62.332 49.225,62.332 84.176,62.332 105.207,62.332 118.567,62.332 ; 18.72,70.458 18.72,76.911 22.022,80.213 55.372,80.213 76.073,80.213 95.707,80.213 115.773,80.213 134.842,80.213 153.911,80.213 172.974,80.213 191.973,80.213 211.099,80.213 233.451,80.213 259.359,80.213 265.074,74.498 265.074,68.631 263.555,67.111 ; 49.987,42.951 68.605,42.951 106.172,42.951 160.35,42.951 192.036,42.951 211.099,42.951 236.169,42.951 253.035,42.951 263.55,42.951 270.256,49.657 ; 118.567,62.382 124.358,62.382 ; 124.358,62.408 144.145,62.408 162.408,62.408 181.254,62.408 201.701,62.408 220.775,62.408 222.18,61.002
  Top Layer w0.8: 87.681,38.532 88.392,37.821 ; 87.706,36.599 88.417,37.31 ; 87.757,36.649 88.468,37.361
  Top Layer w1: 86.919,37.567 88.392,37.567 90.759,37.567 93.883,34.442 118.743,34.442 119.329,33.857 119.329,4.775